# Altium PCB nRF52_UWB_MPU_MTi_V2.0.pcbdoc
Units mil, origin at the board's own origin, x right, y up, seen from the top; angles counter-clockwise.
Board outline 4647.51 x 47554.17 mil, 2 copper layers (Top Layer, Bottom Layer); 28 components, 30 nets, 175 pads, 70 vias.
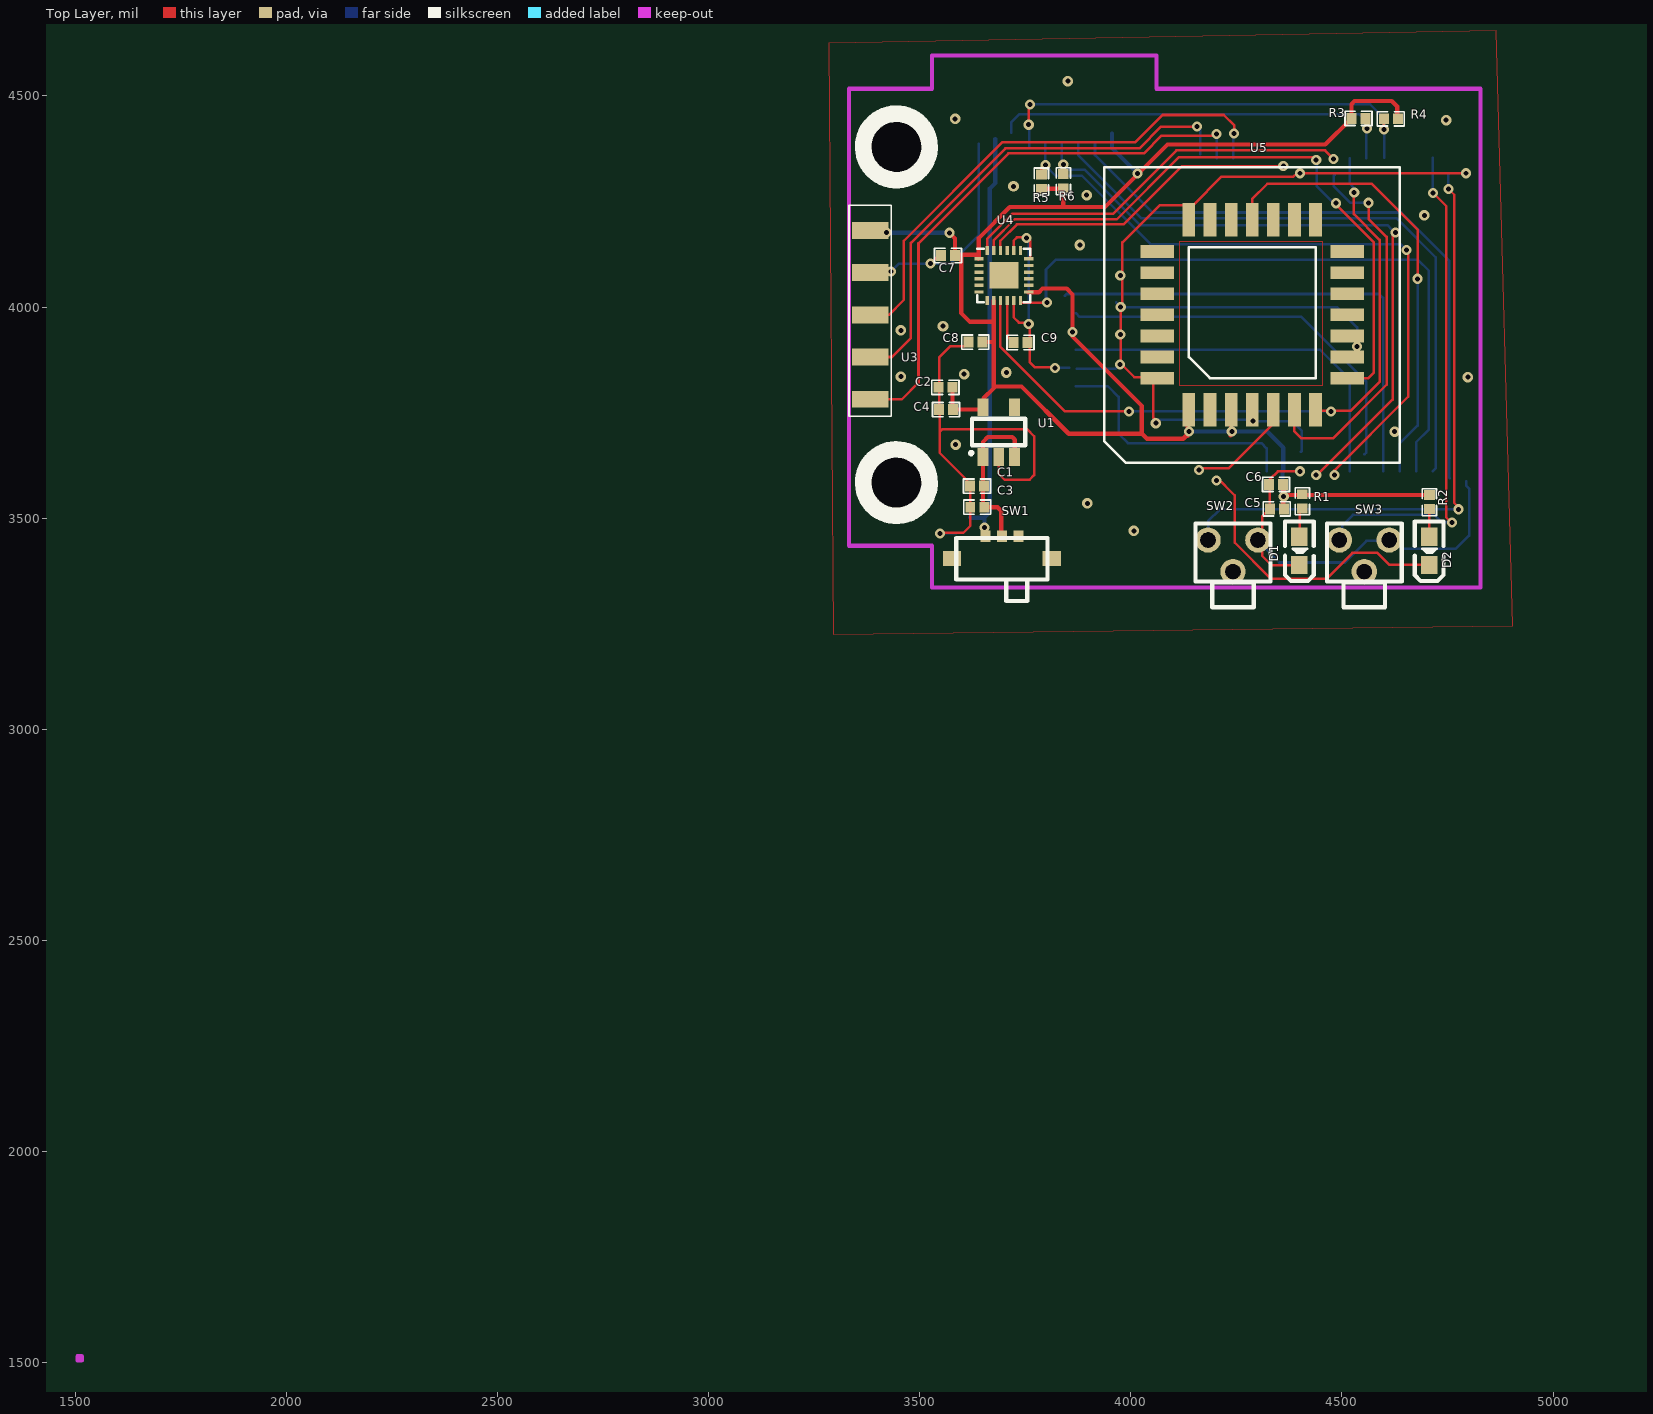
[diagram p0: Top Layer view]
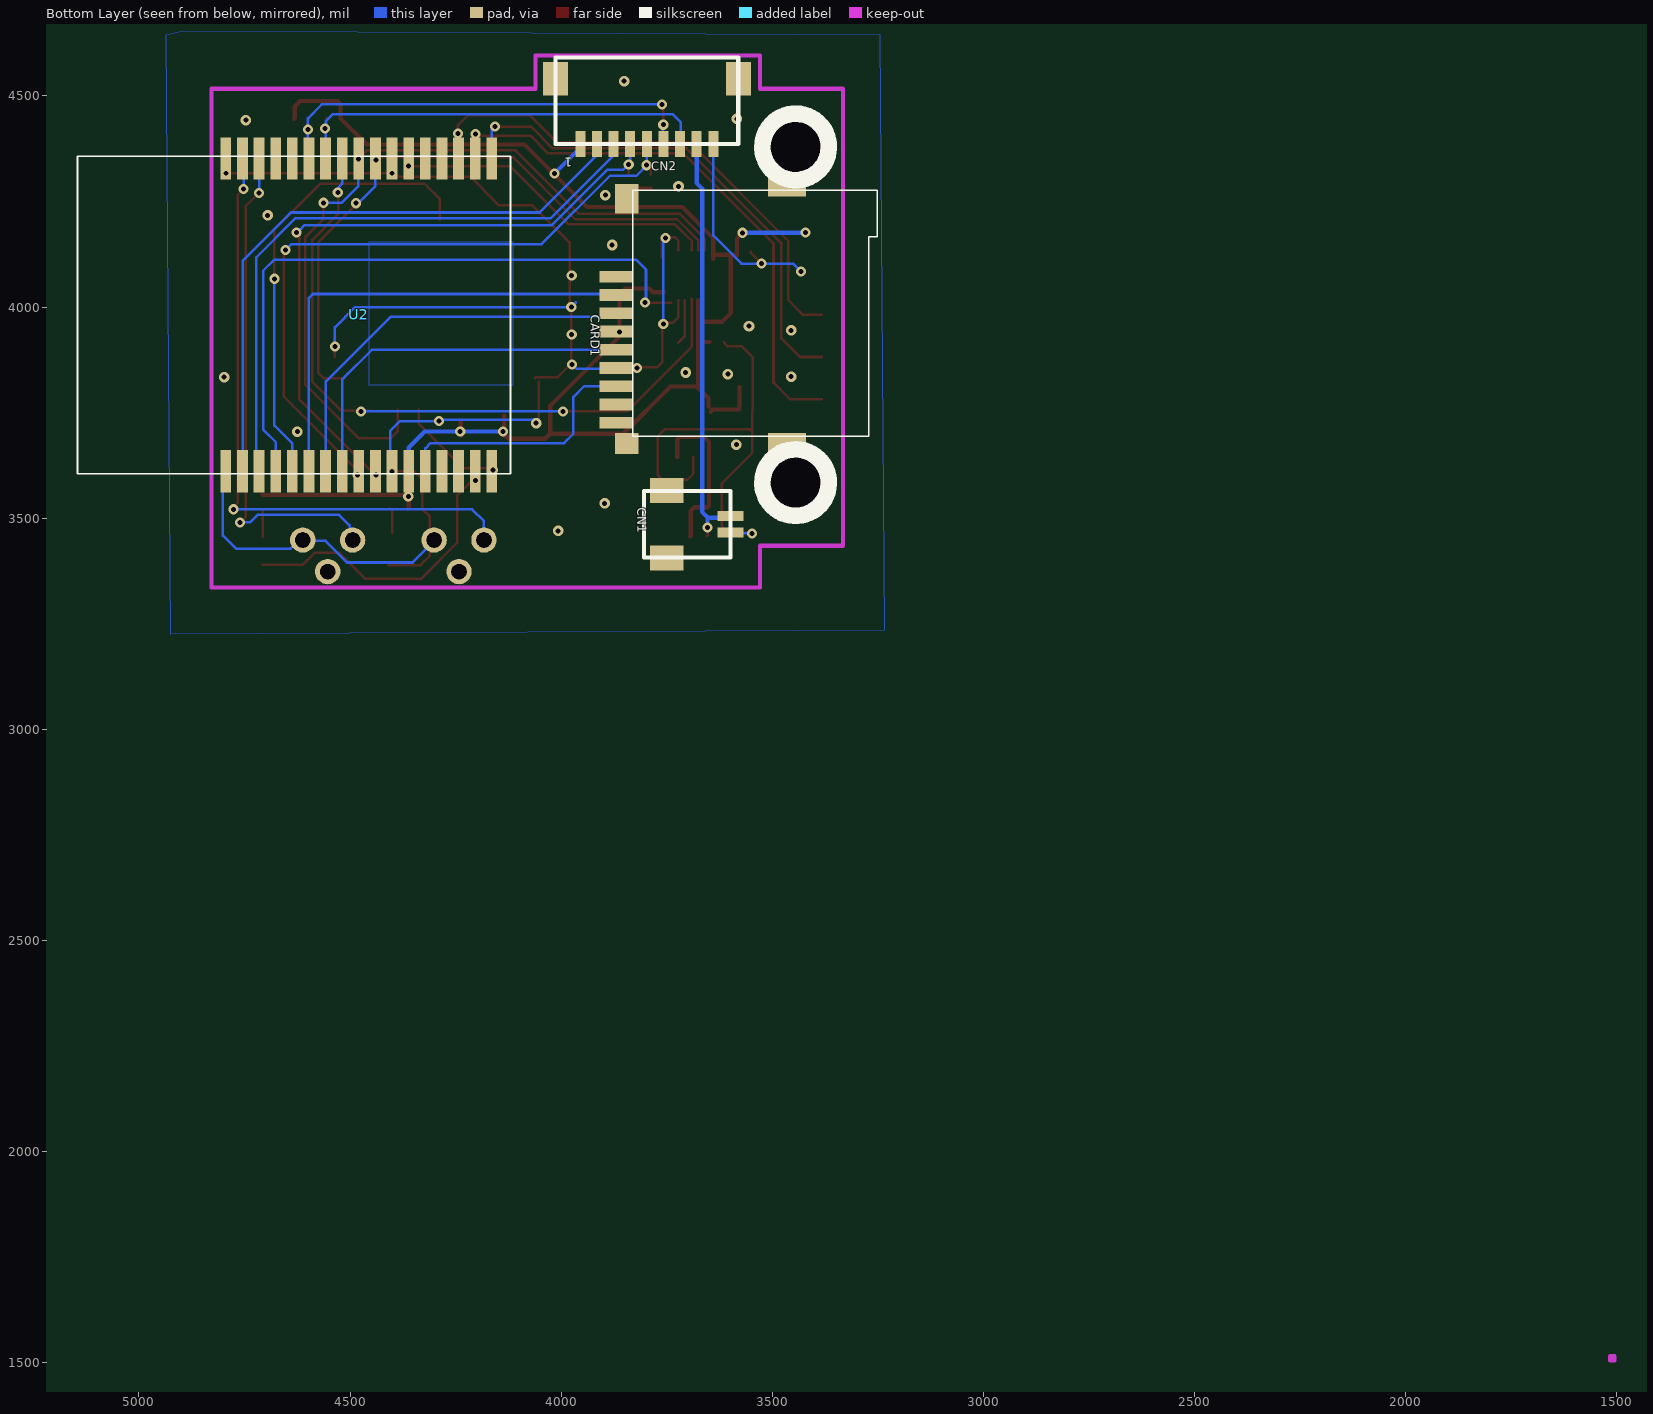
[diagram p1: Bottom Layer view, seen from below]

## Layer stack, top to bottom
Top Layer: signal copper (thickness not stored)
Dielectric: dielectric 12.6, FR-4, Dk 4.8
Bottom Layer: signal copper (thickness not stored)

## Board outline
5647.51,1000 1000,1000 1000,48554.17 5647.51,48554.17

## Components (designator, comment, footprint, x,y, rotation, side; value= is the part's Value field where it differs from the comment)
C1 "10uF" 0402#1 3635.95,3575.88 r0 top
C2 "10uF" 0402#2 3561,3810 r0 top
C3 "100nF" 0402#2 3636.3,3526 r0 top
C4 "100nF" 0402#1 3562.35,3757.12 r0 top
C5 "10uF" 0402#2 4346,3522 r0 top
C6 "100nF" 0402#2 4344,3580 r0 top
C7 "10nF" 0402#2 3567,4122 r0 top
C8 "100nF" 0402#2 3632,3917 r0 top
C9 "100nF" 0402#2 3739,3916 r0 top
CARD1 "HYC77-TF09-200" TF-015 3667.05,3981.73 r270 bottom
CN1 "A1002WV-S-2P" A1002WR-S-2P_LEO 3674.92,3485.66 r90 bottom
CN2 "A1002WR-S-9P" A1002WR-S-9P_LEO 3796.97,4462.05 r180 bottom
D1 "RED" LED-0603 4399.33,3422.67 r90 top
D2 "GREEN" LED-0603 4706.42,3422.67 r90 top
R1 "1K" 0402#2 4406,3540 r270 top
R2 "200" 0402#2 4707,3538 r90 top
R3 "10K" 0402#2 4539,4447 r180 top
R4 "10K" 0402#2 4616,4446 r0 top
R5 "10K" 0402#2 3788,4297 r270 top
R6 "10K" 0402#2 3840,4298 r270 top
SW1 "SSAJ120100" SW-SMD-5.5X2.5 3694.61,3430.54 r0 top
SW2 "KAN4562-0501C" KAN4562-0501C 4241.85,3410.86 r0 top
SW3 "KAN4562-0501C" KAN4562-0501C 4552.87,3410.86 r0 top
U1 "SPX3819M5-L-3-3/TR" SOT-23-5 3687,3704 r90 top
U2 "DWM1001" DWM1001 4631.61,3981.73 r270 bottom
U3 "GPS_Header" GPS_HEADER_SMT_NEW 3332.4,3465.98 r90 top
U4 "MPU-9250" QFN-24-1EP_3X3MM_PITCH0.4MM 3699,4075 r0 top
U5 "MTi-1" PLCC-28 4287.4,3981.73 r0 top

## Footprints (in the part's own frame and the unit in brackets; to place one, negate y for a bottom-side part, rotate by r counter-clockwise, add the part's x,y. Pads: shape width x height; smd on the part's side, far side on the other; paste and mask are expansions set on the pad)
0402#1 [mil]
  rect 23.7x25.6 smd: 1(-16.7,0) 2(16.7,0)
  silkscreen extent -32,-17 32,17
0402#2 [mil]
  rect 23.6x25.6 smd: 1(-16.69,0) 2(16.7,0)
  silkscreen extent -32,-17 32,17
A1002WR-S-2P_LEO [mil]
  rect 23.6x61 smd: 1(-19.75,-75.8)
  rect 23.7x61 smd: 2(19.6,-75.8)
  rect 59.1x78.7 smd: 3(-80,75) 4(80,75)
  silkscreen extent -79,-76 79,129
A1002WR-S-9P_LEO [mil]
  rect 23.6x61.1 smd: 1(-157.5,-75.7) 2(-118.1,-75.7) 3(-78.6,-75.8) 4(-39.4,-75.7) 5(0,-75.7) 6(39.4,-75.7) 7(78.7,-75.7) 8(118.05,-75.7) 9(157.5,-75.7)
  rect 59.1x78.7 smd: 10(-216.5,78.7) 11(216.55,78.7)
  silkscreen extent -217,-76 217,129
DWM1001 [mm]
  rect 2.54x0.65 smd: 1(9.406,-4.13) 2(9.406,-3.129) 3(9.406,-2.128) 4(9.406,-1.128) 5(9.406,-0.129) 6(9.406,0.871) 7(9.406,1.872) 8(9.406,2.87) 9(9.406,3.871) 10(9.406,4.872) 11(9.406,5.87) 12(9.406,6.871) 13(9.406,7.872) 14(9.406,8.872) 15(9.406,9.871) 16(9.406,10.871) 17(9.406,11.872) 18(-9.405,11.872) 19(-9.405,10.871) 20(-9.405,9.871) 21(-9.405,8.872) 22(-9.405,7.872) 23(-9.405,6.871) 24(-9.405,5.87) 25(-9.405,4.872) 26(-9.405,3.871) 27(-9.405,2.87) 28(-9.405,1.872) 29(-9.405,0.871) 30(-9.405,-0.129) 31(-9.405,-1.128) 32(-9.405,-2.128) 33(-9.405,-3.129) 34(-9.405,-4.13)
  silkscreen extent -9.54,-13.05 9.56,13.02
GPS_HEADER_SMT_NEW [mm]
  rect 1.019x2.2 smd: 1(18.18,-1.27) 2(15.64,-1.27) 3(13.1,-1.27) 4(10.56,-1.27) 5(8.02,-1.27)
  round 3 hole 3 unplated: ""(3,-2.85) ""(23.2,-2.85)
  silkscreen extent 1,-4.85 25.2,0
KAN4562-0501C [mil]
  round 60 hole 36 slot 36.2 at 0 deg: 0(0,-37.4) 1(-59.05,37.4) 2(59.06,37.4)
  silkscreen extent -89,-122 89,77
LED-0603 [mil]
  rect 43x39 smd: 1(33.5,0) 2(-33.51,0)
  silkscreen extent -72,-34 70,34
PLCC-28 [mil]
  rect 80x30 smd: 1(-225,-0.03) 2(-225,-50.03) 3(-225,-100.03) 4(-225,-150.03) 12(225,-150.03) 13(225,-100.03) 14(225,-50.03) 15(225,-0.03) 16(225,49.97) 17(225,99.97) 18(225,149.97) 26(-225,149.97) 27(-225,99.97) 28(-225,49.97)
  rect 30x80 smd: 5(-150,-225) 6(-100,-225) 7(-50,-225) 8(0,-225) 9(50,-225) 10(100,-225) 11(150,-225) 19(150,225) 20(100,225) 21(50,225) 22(0,225) 23(-50,225) 24(-100,225) 25(-150,225)
  silkscreen extent -350,-350 350,350
QFN-24-1EP_3X3MM_PITCH0.4MM [mil]
  rect 21.65x7.87 smd: 1(-59.05,39.35) 2(-59.05,23.65) 3(-59.05,7.85) 4(-59.05,-7.85) 5(-59.05,-23.65) 6(-59.05,-39.35) 13(59.05,-39.35) 14(59.05,-23.65) 15(59.05,-7.85) 16(59.05,7.85) 17(59.05,23.65) 18(59.05,39.35)
  rect 7.87x21.65 smd: 7(-39.35,-59.05) 8(-23.6,-59.05) 9(-7.9,-59.05) 10(7.9,-59.05) 11(23.6,-59.05) 12(39.4,-59.05) 19(39.4,59.05) 20(23.6,59.05) 21(7.9,59.05) 22(-7.9,59.05) 23(-23.6,59.05) 24(-39.35,59.05)
  rect 34.45x31.5 smd: 25(-17.1,-15.75) 25(-17.1,15.75) 25(17.15,-15.75) 25(17.15,15.75)
  silkscreen extent -63,-63 63,63
SOT-23-5 [mm]
  rect 1.06x0.65 smd: 1(-1.499,0.95) 2(-1.499,0) 3(-1.499,-0.95) 4(1.501,-0.95) 5(1.501,0.95)
  silkscreen extent -1.33,-1.6 0.8,1.71
SW-SMD-5.5X2.5 [mil]
  rect 23.6x27.6 smd: 1(-39.4,26.58) 2(39.4,26.58) C(0,26.58)
  rect 43.31x35.43 smd: 4(-118.16,-26.54) 5(118.14,-26.54)
  silkscreen extent -108,-127 108,23
TF-015 [mil]
  rect 27.6x78.8 smd: 1(-90.2,-202.55) 3(-3.75,-202.55) 4(39.55,-202.55) 5(82.8,-202.55) 6(126,-202.55) 7(169.2,-202.55) 8(212.4,-202.55) 9(255.9,-202.55)
  rect 27.6x78.7 smd: 2(-46.9,-202.5)
  rect 50x55 smd: 10(305,-177.4)
  rect 50x90 smd: 11(305,202.6) 12(-305,202.6)
  rect 70x55 smd: 13(-274.97,-177.45)
  silkscreen extent -295,-163 288,416

## Via types
v1: diameter 24, hole 11.82, Top Layer to Bottom Layer, 53 vias
v2: diameter 25, hole 11.82, Top Layer to Bottom Layer, 17 vias

## Nets (pads, with @x,y where several pads share a name; then routed paths per layer and width w, separated by ;. In a path a pad name is that pad's centre, name@x,y a point inside that pad or via, vN(x,y) a via of type N, cw(c..) or ccw(c..) an arc to the next point about the centre after c; other vN are vias at no path point)
BUTTON_RST: SW2.1 U2.33 | length 1454.8
  Top Layer w6: v1(4752,4280) 4766,4266 4766,3536 4776,3526 v1(4776,3521)
  Bottom Layer w6: SW2.1 4182.8,3492.8 4211,3521 v1(4776,3521) ; v1(4752,4280) 4752,4315 U2.33@4753,4316
BUTTON_SDCARD: SW3.1 U2.32 | length 1199.6
  Top Layer w6: v1@4714,4272 4747,4239 4747,3502 4759,3490 v1(4761,3490)
  Bottom Layer w6: SW3.1@4501,3448.26 4501,3483 4526,3508 4719,3508 4737,3490 v1(4761,3490) ; U2.32@4715,4354 4715,4271 v1(4716,4270)
CHARGE_VC: CN1.2 CN2.8 SW1.1 | length 985.4
  Top Layer w6: v1(3653,3478) 3653,3459.33 SW1.1
  Bottom Layer w10: CN1.2@3619,3502 3620,3501 3652,3501 3666,3515 3666,4281 3679,4294 CN2.8@3679,4398 ; v1(3653,3478) 3653,3500
D2_1: D2.1 R2.1 | length 65.4
  Top Layer w6: D2.1 4706.42,3520.72 R2.1
FOOT_2: CN2.4 R6.1 U2.10 | length 1573.5
  Top Layer w6: R6.1 v1(3840,4338) ; v1(4439,3602) 4441,3602 4620,3781 v1@4620,4171
  Bottom Layer w6: CN2.4 3836.37,4341.63 3853,4325 3891,4325 4022,4194 4608,4194 4619,4183 v1@4619,4171
  other v1: 4627,4177
FOOT_5: CN2.5 R5.1 U2.9 | length 1620.5
  Top Layer w6: R5.1 3788,4326 v1(3798,4336) ; v1(4482,3602) 4482,3613 4657,3788 v1@4657,4134
  Bottom Layer w6: CN2.5 3796.97,4336.03 3822,4311 3884,4311 4046,4149 4639,4149 v1(4653,4135)
FOOT_6: CN2.6 R4.1 U2.29 | length 1077.6
  Top Layer w6: v1(3758,4432) 3758,4477 v1(3761,4480) ; R4.1 4599.3,4422.7 v1@4601,4421
  Bottom Layer w6: CN2.6@3759,4377 v1@3759,4434 ; v1(3761,4480) 4567,4480 4600,4447 U2.29@4600,4354
  other v1: 4600,4421
FOOT_7: CN2.7 R3.1 U2.28 | length 993.2
  Top Layer w6: R3.1 4555.7,4425.31 v1@4558,4423
  Bottom Layer w6: CN2.7@3717,4413 3717,4438 3736,4457 4540,4457 4557.91,4439.09 U2.28
  other v1: 4559,4423
GND: C1.1 C2.1 C3.1 C4.1 C5.1 C6.1 C7.1 C8.1 C9.2 CARD1.6 CN1.1 CN2.9 D1.2 SW2.2 SW3.2 U1.2 U2.1 U2.11 U2.24 U2.34 U3.2 U4.11 U4.18 U4.20 U5.4 U5.8 U5.13 U5.14 U5.25 | length 5818.7
  Top Layer w6: v1(3525,4103) 3551,4129 C7.1@3551,4131 ; v1@3547,3466 3548,3465 3603,3465 3619.6,3481.6 3619.6,3582.4 3547,3655 3547,3755.78 C4.1 3545.65,3880.65 3572,3907 3605.3,3907 C8.1 ; 3547,3704 3554,3711 3754,3711 3771,3694 3771,3602 3760,3591 3701,3591 3687,3605 U1.2 ; U4.11@3722.59,4015.93 3722.59,3975.41 3735,3963 3755,3963 3760,3958 3760,3870 3773,3857 3819,3857 v1(3820,3856) ; U4.20@3722.59,4134.07 3722.59,4157.59 3730,4165 3755,4165 3762,4158 3762,4118.34 U4.18 ; U5.4@4053,3823 4053,3738 v1@4056,3735 ; U5.4 4060.13,3834 4008,3834 3976,3866 v1(3976,4000) 3980,4004 3980,4153 4068,4241 4147,4241 4215,4309 4385,4309 4393,4317 v1(4794,4317) ; v1@4397,3611 4348,3611 4329.3,3592.31 C5.1 4311,3503.7 4311,3411 4333,3389 D1.2@4410,3389 ; U5.14@4535,3928 4536,3927 U5.13@4536,3882 ; SW3.2@4606,3439 SW3.2@4607,3438
  Bottom Layer w6: v1(3432,4084) 3451,4103 3573,4103 3639.47,4169.47 CN2.9 ; v1@3544,3468 v1(3548,3464) CN1.1@3586,3464 ; v1(3753,4164) 3758,4159 v1(3758,3960) ; v1(3820,3856) CARD1.6@3854,3856 ; CARD1.6@3872,3854 3964,3854 v1(3974,3864) ; 3965,4011 v1(3976,4000) 4488,4000 4536,3952 v1(4536,3907) ; v1@4053,3733 4277,3733 4288,3722 v1@4288,3721 ; v1(4289,3730) 4382,3730 4405,3707 4405,3659 U2.11@4403,3657 ; SW2.2@4308,3439 4352,3395 4507,3395 4558,3446 4623,3446 4641,3428 4770,3428 4801,3459 4801,3570 4794,3577 U2.1@4794,3588
  other v1: 4401,3611 4059,3725 3975,3935 3975,4075 4401,4317
  other v2: 4007,3470 3897,3535 3585,3674 4625,3705 4798,3834 3455,3835 3605,3841 3705,3845 3455,3945 3555,3955 3879,4147 4695,4217 3895,4265 3722,4286 4747,4443 3584,4446 3851,4535
GPS_1PPS: U2.19 U3.5 | length 1332.7
  Top Layer w6: U3.5 3457.73,3781.73 3497,3821 3497,4151 3710,4364 4031,4364 4073,4406 v1@4205,4406
  Bottom Layer w6: v1(4203,4410) 4203.61,4409.39 U2.19
GPS_UART_RX: U2.18 U3.4 | length 1201.4
  Top Layer w6: U3.4 3433.73,3881.73 3479,3927 3479,4152 3703,4376 4020,4376 4071.62,4427.62 v1@4157,4427.62
  Bottom Layer w6: v1(4157,4428) 4164,4421 U2.18@4164,4362
GPS_UART_TX: U2.20 U3.3 | length 1229.8
  Top Layer w6: U3.3 3426.73,3981.73 3462,4017 3462,4157 3695,4390 4010,4390 4075,4455 4220,4455 4245,4430 4245,4412 v1(4244,4411)
  Bottom Layer w6: U2.20 4243.01,4410.01 v1(4244,4411)
INT_IMUA: U2.4 U4.12 | length 1555.7
  Top Layer w6: U4.12@3739,4010 3800,4010 v1(3801,4011)
  Bottom Layer w6: v1@3799,4010 3799,4089 3822,4112 4680,4112 4706,4086 4706,3710 4676.01,3680.01 U2.4
INT_IMUB: U2.5 U5.22 | length 1091.3
  Top Layer w6: U5.22 4287.4,4256.4 4323,4292 4571,4292 4680,4183 v1@4680,4067
  Bottom Layer w6: U2.5 4636.71,3676.71 4679,3719 v1(4679,4067)
LED_R: D2.2 U2.16 | length 705.1
  Top Layer w6: v1@4204,3596 4246,3554 4246,3442 4332,3356 4463,3356 4525,3418 4584,3418 4612.84,3389.16 D2.2
  other v1: 4203,3589
R1_2: D1.1 R1.2 | length 60.8
  Top Layer w6: D1.1@4400,3465 4400,3517.3 R1.2
SDCARD_CLK: CARD1.5 U2.8 | length 895.5
  Bottom Layer w6: CARD1.5 4448.07,3898.93 4519,3828 4519,3611.82 U2.8
SDCARD_MISO: CARD1.7 U2.13 | length 617.9
  Bottom Layer w6: CARD1.7 3945.47,3812.53 3971,3787 3971,3700 3993,3678 4309,3678 4321.71,3665.29 U2.13
SDCARD_MOSI: CARD1.3 U2.7 | length 928.9
  Bottom Layer w6: CARD1.3 3878.08,3977 4404,3977 4557,3824 4557,3655 U2.7@4553,3651
SDCARD_NCS: CARD1.2 U2.6 | length 1169.1
  Bottom Layer w6: CARD1.2@3844,4027 3848,4031 4587.97,4031 4597.31,4021.66 U2.6
SPI_CLK: U2.25 U4.23 U5.12 | length 1499.6
  Top Layer w6: U4.23@3675.4,4134.07 3675.4,4158.4 3725.02,4208.02 3967.02,4208.02 4114,4355 v1@4438,4355 ; v1@4486,4249 4486,4243 4575,4154 4575,3844 4562.73,3831.73 U5.12
  Bottom Layer w6: U2.25 4439.81,4287.19 v1@4480,4247
  other v1: 4486,4246 4439,4348
SPI_MISO: U2.27 U4.9 U5.11 | length 1675.5
  Top Layer w6: U4.9@3691,4015.93 U4.9@3691,4020 ; U4.9@3691.1,4015.93 3691.1,3905.9 3844,3753 v1(3996,3753) ; U5.11@4450,3754 4520,3754 4589,3823 4589,4159 4528,4220 v1@4528,4271
  Bottom Layer w6: v1(3996,3753) v1(4474,3753) ; U2.27 4518.61,4292.39 v1@4529,4282
  other v1: 4529,4271
SPI_MOSI: U2.26 U4.24 U5.10 | length 1846.9
  Top Layer w6: U4.24@3659.64,4134.07 3659.64,4161.64 3719.46,4221.46 3958.46,4221.46 4108,4371 4460,4371 v1(4480,4351) ; U5.10 4387.4,3705.6 4404,3689 4479,3689 4605.97,3815.97 4605.97,4166.03 4563,4209 v1(4563,4247)
  Bottom Layer w6: U2.26@4483,4313 4481,4311 4481,4286 4520,4247 v1(4563,4247)
SPI_NCS_MPU92: U2.23 U4.22 | length 772.2
  Top Layer w6: U4.22@3691.1,4134.07 3691.1,4157.1 3730,4196 3983,4196 4121,4334 v1@4367,4334
  other v1: 4361,4334
SPI_NCS_MTI: U2.17 U5.9 | length 254.5
  Top Layer w6: v1(4161,3614) 4165,3618 4231,3618 4337.4,3724.4 U5.9
SWD_CLK: CN2.2 U2.2 | length 1484.3
  Bottom Layer w6: CN2.2 3915.07,4359.93 4051,4224 4640,4224 4754,4110 4754,3596 U2.2@4755,3595
SWD_DIO: CN2.3 U2.3 | length 1483
  Bottom Layer w6: CN2.3 3875,4385.68 3875,4360 4025,4210 4630,4210 4722,4118 4722,3618.02 U2.3
U4_10: C9.1 U4.10 | length 106.3
  Top Layer w6: U4.10@3706.89,4015.93 3706.89,3931.42 C9.1
VCC3.3: C2.2 C4.2 C5.2 C6.2 C7.2 C8.2 CARD1.4 CN2.1 R1.1 R2.2 R3.2 R4.2 R5.2 R6.2 U1.5 U2.12 U3.1 U4.1 U4.8 U4.13 U5.5 U5.7 | length 4258.7
  Top Layer w10: v1(3570,4176) 3583.7,4162.3 C7.2 3585.71,4124 3640,4124 ; C2.2 3577.7,3758.47 C4.2 3640.88,3757.12 U1.5@3646,3752 ; 3598,4124 3598,3986 3619,3965 3673.4,3965 3675.4,3963 ; U4.1 3639.95,4163.95 3713.01,4237.01 3939.01,4237.01 4087,4385 4460.3,4385 R3.2 4522.3,4480.3 4530,4488 4618,4488 4631,4475 4631,4447.71 R4.2 ; C8.2 3675.4,3917 ; U1.5 3651,3764.49 3651,3784 3675.4,3808.4 U4.8@3675.4,4015.93 ; 3675.4,3812 3741,3812 3853,3700 4026,3700 ; U4.13@3757,4035 3782,4035 3791,4044 3848,4044 3862,4030 3862,3930 4026,3766 4026,3700 ; R5.2 3839,4280.3 R6.2 3840,4239.01 3842,4237.01 ; v1@4135,3695 U5.5@4135,3743 ; v1@4141,3705 4124,3688 4038,3688 4026,3700 ; v1@4236,3696 4238,3698 U5.7@4238,3732 ; C5.2 4360.7,3524 C6.2 4362,3578.7 4362,3557 4364.3,3554.71 R2.2 ; R1.1 R1.1@4407.99,3554.71
  Bottom Layer w10: v1@3422,4177 3423,4176 v1(3570,4176) ; CN2.1@3955,4411 3955,4377 v1(4016,4316) ; v1(4138,3705) 4323,3705 4361.11,3666.89 U2.12 ; U2.12@4359,3613 4359,3554 v1@4361,3552
  other v1: 4362,3551 4239,3705 3862,3941 3421,4177
VCC3.7: C1.2 C3.2 SW1.C U1.1 U1.3 | length 384.1
  Top Layer w10: SW1.C 3693,3458.73 3693,3517 3684,3526 C3.2 3649.6,3529.4 3649.6,3680.6 3661,3692 3719,3692 3725,3686 3725,3645.6 U1.3
pads on no net: CARD1.1 CARD1.8 CARD1.9 CARD1.10 CARD1.11 CARD1.12 CARD1.13 CN1.3 CN1.4 CN2.10 CN2.11 SW1.2 SW1.4 SW1.5 SW2.0 SW3.0 U1.4 U2.14 U2.15 U2.21 U2.22 U2.30 U2.31 U3. U4.2 U4.3 U4.4 U4.5 U4.6 U4.7 U4.14 U4.15 U4.16 U4.17 U4.19 U4.21 U4.25 U5.1 U5.2 U5.3 U5.6 U5.15 U5.16 U5.17 U5.18 U5.19 U5.20 U5.21 U5.23 U5.24 U5.26 U5.27 U5.28

## Polygon pours and split planes (outlines as drawn)
GND on Bottom Layer (solid): 4115,4155 4115,3815 4455,3815 4455,4155 4125,4155
GND on Bottom Layer (solid): 3245,4645 3235,3235 4925,3225 4935,4645 4895,4655
GND on Top Layer (solid): 4115,4155 4115,3815 4455,3815 4455,4155
GND on Top Layer (solid): 3285,4625 3295,3225 4905,3245 4865,4655

## Silkscreen, mask and mechanical layers (free items; w line width, h text height)
Document:
  lines w0.1: 3322.76,24776.08 3324.76,24778.08

## Text inside footprints (layer, text, board x,y; h text height)
CN2: Bottom Overlay "1" at 3974.15,4361.14 h35 r180
U3: Mechanical 3 "26.2" at 3045,3875.43 h35 r90; Mechanical 3 "37.4" at 4095.56,3045.01 h35 r179